# Altium PCB final_sensor_pcb_v3.PcbDoc (part 2 of 3)
Units mm, origin at the board's own origin, x right, y up, seen from the top; angles counter-clockwise.
Board outline 108.2 x 22.22 mm, 2 copper layers (Top Layer, Bottom Layer); 92 components, 55 nets, 247 pads, 83 vias.
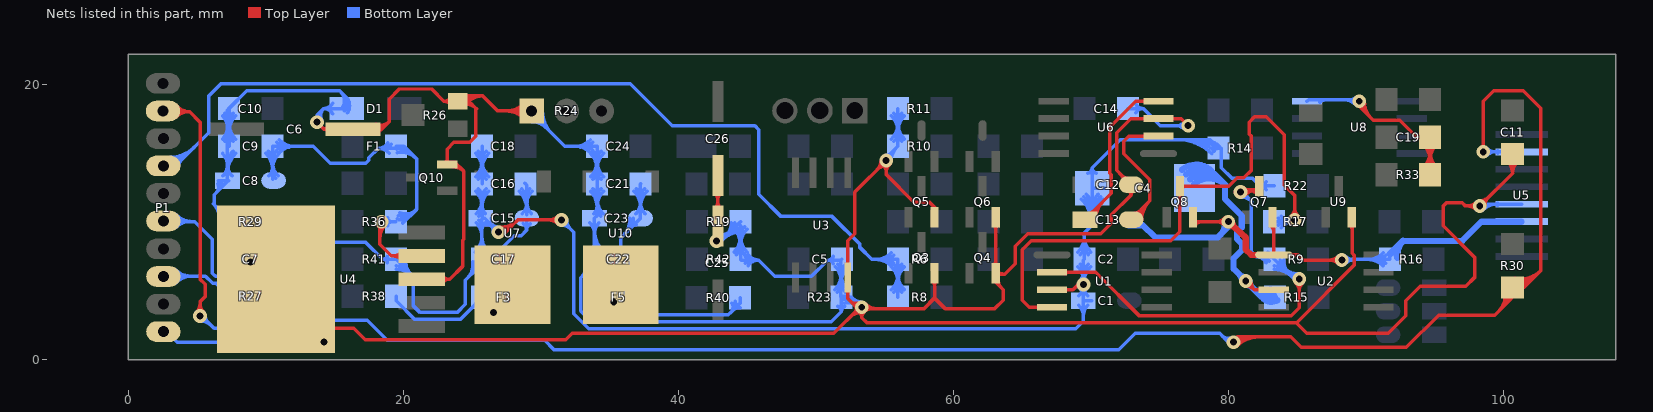
[diagram p2: the nets of this part, all layers, seen from the top]

## Via types
v1: diameter 1, hole 0.5, Top Layer to Bottom Layer, 83 vias

## Nets (pads, with @x,y where several pads share a name; then routed paths per layer and width w, separated by ;. In a path a pad name is that pad's centre, name@x,y a point inside that pad or via, vN(x,y) a via of type N, cw(c..) or ccw(c..) an arc to the next point about the centre after c; other vN are vias at no path point) (continued)
GNDA: C5.1 C6.2 C7.1 C8.2 C9.1 C10.1 C11.1 C12.1 C14.1 C21.1 C22.1 C23.2 C24.1 C25.2 C26.2 D1.1 P1.1 Q3.2 Q4.2 Q5.2 Q6.2 Q10.2 R10.2 R11.2 R19.1 R23.2 R24.1 R26.3 R29.1 R42.1 U3.4 U4.3 U5.4 U6.3 U9.2 | length 505.7
  Top Layer w0.254: U4.3@13.687,1.841 cw(c14.76,0.768) U4.3@14.76,2.286 ; v1(13.716,17.272) 14.224,16.764 ; C6.2@14.5,16.595 ccw(c14.224,16.455) 14.224,16.764 ; C6.2@14.5,16.933 cw(c14.224,17.073) 14.224,16.764 ; U4.3@14.859,2.286 16.383,2.286 17.232,1.437 31.809,1.437 32.277,1.905 51.308,1.905 53.086,3.683 v1@53.34,3.683 ; C6.2@14.859,16.764 14.224,16.764 ; C6.2@16.332,16.764 18.415,16.764 ; C6.2@17.782,16.639 ccw(c18.002,17.186) 18.42,16.769 ; C6.2@17.877,16.874 ccw(c18.159,17.573) 18.691,17.04 ; C6.2@17.972,17.11 ccw(c18.315,17.96) 18.963,17.312 ; C6.2@18.171,16.608 cw(c18.415,16.495) 18.415,16.764 ; C6.2@18.171,16.92 ccw(c18.415,17.033) 18.415,16.764 ; U4.3@21.336,5.842 23.368,5.842 ; U4.3@22.814,5.594 cw(c23.368,5.101) 23.368,5.842 ; U4.3@22.814,6.09 ccw(c23.368,6.583) 23.368,5.842 ; Q10.2@23.057,14.311 ccw(c22.761,14.607) 23.179,14.607 ccw(c23.597,14.607) Q10.2@23.301,14.311 ; Q10.2@23.114,14.351 Q10.2@23.179,14.351 ; Q10.2@23.179,14.189 Q10.2@23.179,14.351 ; R26.3@23.457,18.519 ccw(c22.943,18.18) 22.943,18.796 ; R26.3@23.472,19.062 cw(c22.943,19.455) 22.943,18.796 ; Q10.2@23.629,14.016 cw(c23.629,12.918) 24.406,13.694 ; Q10.2@23.629,14.27 cw(c23.629,13.785) 23.972,14.128 ; R26.3@23.979,19.06 cw(c24.167,18.336) 24.696,18.865 ; R26.3@24.024,18.801 cw(c24.771,18.246) 24.771,19.177 ; R26.3@24.028,18.805 cw(c24.392,18.427) 24.763,18.798 ; R26.3@24.043,18.814 cw(c24.297,17.838) 25.01,18.551 ; R26.3@24.107,18.568 cw(c24.427,17.34) 25.324,18.237 ; R26.3@24.204,18.622 cw(c24.571,18.24) 24.946,18.615 ; R26.3@24.228,18.649 cw(c25.276,17.872) 25.276,19.177 ; R26.3@24.257,19.177 25.781,19.177 ; R26.3@24.38,18.439 cw(c24.751,18.053) 25.129,18.432 ; R26.3@24.432,18.498 cw(c25.781,17.497) 25.781,19.177 ; R26.3@24.482,18.978 ccw(c24.765,19.108) 24.765,18.796 ; R26.3@24.493,18.61 cw(c24.765,18.505) 24.765,18.796 ; R24.1@28.79,17.538 ccw(c27.471,16.219) 27.471,18.085 ccw(c27.471,19.951) R24.1@28.79,18.632 ; R24.1@28.97,17.718 ccw(c28.084,16.832) 28.084,18.085 ccw(c28.084,19.338) R24.1@28.97,18.452 ; R24.1@29.337,18.085 26.873,18.085 25.781,19.177 ; C25.2@42.68,11.021 ccw(c42.208,11.493) 42.875,11.493 ; C26.2@42.682,12.093 cw(c42.216,11.627) 42.875,11.627 cw(c43.534,11.627) C26.2@43.068,12.093 ; C25.2@42.875,9.957 C26.2@42.875,13.386 ; 42.875,11.481 ccw(c43.526,11.481) C25.2@43.066,11.021 ; U3.4@52.237,5.032 cw(c52.027,4.822) 52.324,4.822 cw(c52.621,4.822) U3.4@52.411,5.032 ; U3.4@52.237,6.906 ccw(c52.027,7.116) 52.324,7.116 ccw(c52.621,7.116) U3.4@52.411,6.906 ; 52.486,3.083 cw(c53.34,2.23) v1@53.34,3.437 ; 52.515,4.254 ccw(c52.922,4.662) v1@53.176,4.145 ; 52.766,4.003 ccw(c53.087,4.325) v1@53.288,3.917 ; 52.793,3.39 ccw(c52.373,3.81) v1@52.967,3.81 ; 52.92,3.517 cw(c53.34,3.097) v1@53.34,3.691 ; v1@53.023,3.746 52.324,4.445 U3.4@52.324,5.969 52.324,8.636 52.832,9.144 52.832,12.192 v1(55.118,14.478) 55.118,13.462 57.1,11.48 57.197,11.48 57.247,11.43 58.293,11.43 58.639,11.084 Q5.2@58.639,10.349 ; v1@53.111,3.515 cw(c52.748,3.048) 53.34,3.048 ; v1@53.424,3.894 ccw(c53.934,4.404) 53.934,3.683 ccw(c53.934,3.216) v1@53.604,3.546 ; v1@53.569,3.515 ccw(c53.932,3.048) 53.34,3.048 ; v1@53.604,4.074 ccw(c54.547,5.017) 54.547,3.683 ; v1@54.745,14.478 cw(c53.845,14.478) 54.481,13.841 cw(c55.118,13.205) v1@55.118,14.105 ; v1@54.854,14.214 cw(c54.218,13.578) 55.118,13.578 cw(c56.018,13.578) v1@55.382,14.214 ; Q3.2@58.517,5.713 cw(c58.221,5.417) 58.639,5.417 cw(c59.057,5.417) Q3.2@58.761,5.713 ; 58.578,11.145 cw(c58.237,10.803) Q5.2@58.72,10.798 ; Q3.2@58.639,6.285 58.639,4.48 ; Q4.2@62.962,6.857 ccw(c62.666,7.153) 63.084,7.153 ccw(c63.502,7.153) Q4.2@63.206,6.857 ; Q6.2@62.962,9.777 cw(c62.666,9.481) 63.084,9.481 cw(c63.502,9.481) Q6.2@63.206,9.777 ; Q6.2@63.084,10.349 Q4.2@63.084,6.285 63.084,5.623 63.627,5.08 63.627,4.318 62.992,3.683 59.436,3.683 58.639,4.48 ; Q4.2@63.119,6.223 63.754,6.223 64.516,6.985 64.516,8.255 65.405,9.144 70.739,9.144 71.501,9.906 71.501,10.541 72.934,11.974 ; Q4.2@63.206,6.407 ccw(c63.651,6.852) 63.651,6.223 ; Q4.2@63.257,5.833 ccw(c64.158,5.823) 63.521,5.186 ; 72.122,13.538 cw(c71.405,12.821) C12.1@72.416,12.742 ; 72.339,13.321 ccw(c72.634,13.616) C12.1@72.634,13.198 ; C12.1@72.73,12.299 cw(c72.575,11.974) 72.934,11.974 ; C12.1@73.139,12.299 ccw(c73.294,11.974) 72.934,11.974 ; U6.3@73.993,17.439 ccw(c73.783,17.229) 73.783,17.526 ccw(c73.783,17.823) U6.3@73.993,17.613 ; U6.3@75.867,17.439 cw(c76.077,17.229) 76.077,17.526 cw(c76.077,17.823) U6.3@75.867,17.613 ; v1(77.089,17.018) 76.581,17.526 U6.3@74.93,17.526 72.898,17.526 71.882,16.51 71.882,13.778 C12.1@72.934,12.725 72.934,11.974 ; 85.026,2.73 89.154,6.858 89.154,7.596 89.027,7.723 89.027,10.314 U9.2@88.992,10.349 ; U9.2@88.87,9.777 cw(c88.49,9.397) 89.027,9.397 ; 89.027,9.566 cw(c89.325,9.566) U9.2@89.114,9.777 ; v1@98.034,10.912 ccw(c97.398,10.276) 97.398,11.176 ccw(c97.398,12.076) v1@98.034,11.44 ; v1@98.298,11.549 ccw(c98.298,12.449) 98.935,11.813 ccw(c99.571,11.176) v1@98.671,11.176 ; C11.1@100.262,14.451 cw(c99.545,13.564) 100.686,13.564 ; C11.1@100.422,14.648 cw(c99.975,14.096) 100.686,14.096 cw(c101.396,14.096) C11.1@100.949,14.648 ; C11.1@100.494,14.329 cw(c100.417,14.072) 100.686,14.072 ; C11.1@100.877,14.329 ccw(c100.954,14.072) 100.686,14.072 ; C11.1@101.109,14.451 ccw(c101.827,13.564) 100.686,13.564 ; 18.415,16.764 18.963,17.312 18.963,18.948 19.7,19.685 22.054,19.685 22.943,18.796 ; 22.943,18.796 24.765,18.796 ; Q10.2@23.179,14.351 23.179,15.302 23.676,15.799 24.816,15.799 25.273,16.256 25.273,18.288 24.765,18.796 ; Q10.2@23.179,14.351 23.749,14.351 24.384,13.716 24.384,8.745 24.301,8.662 24.301,6.775 23.368,5.842 ; 53.34,3.048 v1@53.34,3.683 ; 53.34,3.048 53.721,2.667 84.963,2.667 85.725,1.905 91.63,1.905 92.917,3.192 92.917,4.271 93.98,5.334 97.282,5.334 97.917,5.969 97.917,7.449 95.631,9.735 95.631,11.176 95.877,11.422 97.012,11.422 97.258,11.176 v1(98.298,11.176) 100.686,13.564 ; v1@53.34,3.683 57.842,3.683 58.639,4.48 ; 100.686,13.564 C11.1@100.686,14.974 100.686,14.072
  Bottom Layer w0.254: P1.1@2.794,2.032 3.556,1.27 v1(14.224,1.27) ; 6.18,11.323 cw(c5.051,10.195) R29.1@6.645,10.116 ; 6.344,11.159 ccw(c7.317,12.133) R29.1@7.317,10.756 ; 6.407,12.178 ccw(c6.044,12.541) C8.2@6.491,12.794 ; C8.2@6.549,13.026 C8.2@7.203,13.026 ; 6.585,10.918 cw(c5.823,10.157) R29.1@6.899,10.104 ; 6.644,12.415 ccw(c6.346,12.712) C8.2@6.712,12.919 ; R29.1@6.777,10.726 ccw(c7.317,11.266) R29.1@7.317,10.502 ; C7.1@6.814,7.816 ccw(c5.598,9.031) 7.317,9.031 ; R29.1@6.842,9.507 cw(c5.693,8.358) 7.317,8.358 cw(c8.942,8.358) R29.1@7.793,9.507 ; C9.1@6.842,14.994 cw(c5.968,14.12) 7.203,14.12 ; C8.2@6.869,13.361 ccw(c6.061,14.168) 7.203,14.168 ccw(c8.345,14.168) C8.2@7.538,13.361 ; C7.1@6.994,7.636 ccw(c6.212,8.418) 7.317,8.418 ; R29.1@7.021,9.687 cw(c6.306,8.972) 7.317,8.972 cw(c8.329,8.972) R29.1@7.614,9.687 ; C9.1@7.021,15.866 ccw(c6.306,16.581) 7.317,16.581 ccw(c8.329,16.581) 7.614,15.866 cw(c8.605,16.857) 7.203,16.857 ; C10.1@7.021,17.916 cw(c6.306,17.201) 7.317,17.201 cw(c8.329,17.201) 7.614,17.916 ccw(c8.605,16.925) 7.203,16.925 ; R29.1@7.136,10.033 R29.1@7.317,10.033 ; C8.2@7.183,12.954 6.231,12.002 6.231,11.272 7.317,10.186 R29.1@7.317,10.033 ; C8.2@7.203,13.569 cw(c9.218,13.569) C9.1@7.793,14.994 ; 7.203,14.182 cw(c8.605,14.182) C9.1@7.614,15.173 ; C9.1@7.203,16.312 cw(c9.218,16.312) 7.793,17.737 ccw(c8.942,16.588) 7.317,16.588 ccw(c5.693,16.588) 6.842,17.737 cw(c5.968,16.864) 7.203,16.864 ; 7.203,16.919 cw(c5.968,16.919) 6.842,16.045 ccw(c5.693,17.194) 7.317,17.194 ccw(c8.942,17.194) 7.793,16.045 cw(c9.218,17.47) C10.1@7.203,17.47 ; C7.1@7.302,7.278 C7.1@7.29,7.29 7.468,7.112 v1(8.89,7.112) cw(c8.89,8.438) C7.1@7.829,7.643 ; C8.2@7.311,13.026 C8.2@7.203,13.026 ; C7.1@7.317,7.438 R29.1@7.317,10.033 ; 7.317,8.285 ccw(c8.235,8.285) C7.1@7.586,7.636 ; 7.317,8.898 ccw(c8.848,8.898) C7.1@7.766,7.816 ; C9.1@7.317,15.519 C10.1@7.317,18.263 ; C7.1@7.625,7.491 ccw(c8.382,8.058) 8.382,7.112 ; C7.1@7.766,6.764 cw(c8.606,5.924) v1@8.606,7.112 ; v1@8.626,6.848 ccw(c7.99,6.212) 7.99,7.112 ccw(c7.99,8.012) v1@8.626,7.376 ; v1(13.716,17.272) 13.716,17.78 14.199,18.263 ; v1@13.824,17.323 cw(c14.37,17.58) 13.943,18.007 ; v1@13.96,1.006 ccw(c13.324,0.37) 13.324,1.27 ccw(c13.324,2.17) v1@13.96,1.534 ; v1@14.053,17.431 cw(c14.718,17.744) 14.199,18.263 ; D1.1@14.855,17.891 ccw(c14.199,17.498) 14.199,18.263 ; D1.1@14.855,18.634 cw(c14.199,19.028) 14.199,18.263 ; 15.405,19.52 cw(c14.705,18.82) D1.1@15.507,18.24 ; 15.616,19.309 cw(c14.95,18.643) D1.1@15.712,18.091 ; D1.1@15.826,19.099 cw(c15.194,18.466) D1.1@15.918,17.942 ; D1.1@15.875,18.263 14.199,18.263 ; D1.1@15.875,18.415 15.875,19.05 15.367,19.558 8.613,19.558 C10.1@7.317,18.263 ; R24.1@29.337,17.312 cw(c29.337,15.876) 30.353,16.891 ; R24.1@29.337,17.566 cw(c29.337,16.743) R24.1@29.919,17.325 ; R24.1@29.337,18.034 29.337,17.907 31.725,15.519 C24.1@34.087,15.519 ; R24.1@29.602,18.085 ccw(c30.672,18.085) R24.1@29.915,17.329 ; R24.1@29.856,18.085 ccw(c31.539,18.085) 30.349,16.895 ; R24.1@30.11,18.085 ccw(c32.406,18.085) 30.782,16.462 ; 32.944,5.995 ccw(c31.805,7.134) C22.1@33.415,7.209 ; 33.113,6.164 cw(c34.087,5.19) C22.1@34.087,6.567 ; 33.351,6.401 ccw(c32.582,7.17) C22.1@33.668,7.22 ; C22.1@33.547,6.597 cw(c34.087,6.057) C22.1@34.087,6.821 ; C23.2@33.56,9.949 cw(c32.753,9.141) 33.895,9.141 cw(c35.037,9.141) C23.2@34.229,9.949 ; C22.1@33.611,7.816 ccw(c32.926,8.501) 33.895,8.501 ; C21.1@33.611,12.25 cw(c32.462,11.102) 34.087,11.102 cw(c35.712,11.102) C21.1@34.563,12.25 ; C21.1@33.611,13.302 ccw(c32.462,14.451) 34.087,14.451 ccw(c35.712,14.451) C21.1@34.563,13.302 ; C24.1@33.611,14.994 cw(c32.462,13.845) 34.087,13.845 cw(c35.712,13.845) C24.1@34.563,14.994 ; C24.1@33.611,15.044 ccw(c32.462,13.895) 32.462,15.519 ccw(c32.462,17.144) C24.1@33.611,15.995 ; C21.1@33.791,12.43 cw(c33.075,11.715) 34.087,11.715 cw(c35.098,11.715) C21.1@34.383,12.43 ; C21.1@33.791,13.123 ccw(c33.075,13.838) 34.087,13.838 ccw(c35.098,13.838) C21.1@34.383,13.123 ; C24.1@33.791,15.173 cw(c33.075,14.458) 34.087,14.458 cw(c35.098,14.458) C24.1@34.383,15.173 ; C24.1@33.791,15.223 ccw(c33.075,14.508) 33.075,15.519 ccw(c33.075,16.531) C24.1@33.791,15.816 ; C22.1@33.808,7.112 C22.1@34.036,7.112 ; C23.2@33.86,10.617 ccw(c33.313,11.165) 34.087,11.165 ; 33.895,8.202 ccw(c34.949,8.202) C22.1@34.203,7.457 ; 33.895,8.815 ccw(c35.562,8.815) C22.1@34.383,7.636 ; 33.895,9.429 ccw(c36.176,9.429) C22.1@34.563,7.816 ; C22.1@34.062,7.112 32.893,5.943 32.893,3.826 32.906,3.813 32.906,3.539 33.702,2.743 51.13,2.743 51.855,3.468 ; C22.1@34.087,7.29 33.895,7.482 C23.2@33.895,10.283 34.087,10.475 C21.1@34.087,12.776 C24.1@34.087,15.519 ; 34.087,11.072 ccw(c34.984,11.072) C23.2@34.349,10.438 ; 34.087,11.685 ccw(c35.597,11.685) C23.2@34.529,10.617 ; C24.1@34.099,15.531 C24.1@34.087,15.519 ; v1(42.775,8.636) 43.145,8.636 R19.1@44.526,10.017 ; v1@42.775,8.755 ccw(c42.775,9.936) 43.61,9.101 ; v1@42.775,9.009 ccw(c42.775,10.803) R19.1@44.044,9.535 ; 43.292,8.782 cw(c44.526,7.548) R19.1@44.526,9.294 ; 43.413,8.903 ccw(c42.349,9.967) R19.1@43.853,9.967 ; 43.726,9.216 cw(c44.526,8.415) R19.1@44.526,9.548 ; R19.1@43.846,9.337 ccw(c43.216,9.967) R19.1@44.107,9.967 ; R42.1@44.05,7.816 ccw(c42.901,8.965) 44.526,8.965 ccw(c46.151,8.965) R42.1@45.002,7.816 ; R19.1@44.05,9.491 cw(c42.901,8.342) 44.526,8.342 cw(c46.151,8.342) R19.1@45.002,9.491 ; R42.1@44.23,7.636 ccw(c43.515,8.351) 44.526,8.351 ccw(c45.538,8.351) R42.1@44.822,7.636 ; R19.1@44.23,9.67 cw(c43.515,8.955) 44.526,8.955 cw(c45.538,8.955) R19.1@44.822,9.67 ; R19.1@44.526,9.728 R42.1@44.526,7.29 44.577,7.239 45.847,7.239 ; R42.1@44.865,6.993 cw(c45.348,6.642) 45.348,7.239 ; R42.1@44.865,7.486 ccw(c45.349,7.836) 45.349,7.239 ; R42.1@45.07,6.844 cw(c45.847,6.278) 45.847,7.239 ; R42.1@45.071,7.635 ccw(c45.847,8.197) 45.847,7.239 ; C5.1@51.274,7.507 cw(c50.867,7.682) 50.867,7.239 ; C5.1@51.275,6.972 ccw(c50.867,6.794) 50.867,7.239 ; R23.2@51.379,5.072 ccw(c50.324,6.128) 51.816,6.128 ; C5.1@51.416,6.764 cw(c50.451,5.799) 51.816,5.799 ; R23.2@51.559,4.893 ccw(c50.937,5.515) 51.816,5.515 ; R23.2@51.585,3.88 cw(c51.405,3.468) 51.855,3.468 ; C5.1@51.596,6.944 cw(c51.065,6.412) 51.816,6.412 ; 51.816,5.431 cw(c53.701,5.431) C5.1@52.368,6.764 ; 51.816,5.702 ccw(c52.96,5.702) R23.2@52.151,4.893 ; 51.816,6.044 cw(c53.088,6.044) C5.1@52.188,6.944 ; 51.816,6.315 ccw(c53.573,6.315) R23.2@52.331,5.072 ; R23.2@51.83,4.582 cw(c52.109,3.61) 52.825,4.325 ; C5.1@51.855,7.252 C5.1@51.892,7.29 ; R23.2@51.9,4.338 cw(c52.245,3.136) v1@53.13,4.02 ; R23.2@51.943,4.572 51.816,4.699 51.816,7.239 50.867,7.239 ; R23.2@51.97,4.094 cw(c52.381,2.662) v1@53.434,3.716 ; R23.2@52.124,3.88 ccw(c52.305,3.468) 51.855,3.468 ; v1@52.967,3.81 ccw(c52.067,3.81) 52.703,4.447 ccw(c53.34,5.083) v1@53.34,4.183 ; v1(53.34,3.81) 52.603,4.547 R23.2@51.855,4.547 51.855,3.468 ; v1(55.118,14.478) 55.118,14.669 R10.2@55.968,15.519 R11.2@55.968,18.263 ; v1@55.118,14.851 ccw(c55.118,15.29) R10.2@55.428,14.98 ; v1@55.237,14.478 cw(c55.986,14.478) R10.2@55.456,15.008 ; v1@55.491,14.478 cw(c56.853,14.478) R10.2@55.89,15.441 ; R10.2@55.492,16.045 ccw(c54.343,17.194) 55.968,17.194 ccw(c57.593,17.194) R10.2@56.444,16.045 ; R11.2@55.492,17.737 cw(c54.343,16.588) 55.968,16.588 cw(c57.593,16.588) R11.2@56.444,17.737 ; R10.2@55.672,15.866 ccw(c54.957,16.581) 55.968,16.581 ccw(c56.98,16.581) R10.2@56.264,15.866 ; R11.2@55.672,17.916 cw(c54.957,17.201) 55.968,17.201 cw(c56.98,17.201) R11.2@56.264,17.916 ; C14.1@72.695,18.263 73.812,18.263 ; C14.1@73.29,17.948 cw(c73.812,17.671) 73.812,18.263 ; C14.1@73.29,18.577 ccw(c73.812,18.854) 73.812,18.263 ; v1@76.825,16.754 ccw(c76.189,16.118) 76.189,17.018 ccw(c76.189,17.918) v1@76.825,17.282 ; v1(77.089,17.018) 75.057,17.018 73.812,18.263 ; v1@98.298,11.303 U5.4@101.346,11.303 ; v1@98.382,11.092 cw(c98.892,10.582) 98.892,11.303 cw(c98.892,11.77) v1@98.562,11.44 ; v1@98.562,10.912 cw(c99.505,9.969) U5.4@99.505,11.303 ; U5.4@99.604,11.216 ccw(c99.394,11.006) 99.394,11.303 ccw(c99.394,11.6) U5.4@99.604,11.39 ; C8.2@7.203,13.026 7.203,18.148 C10.1@7.317,18.263 ; 45.847,7.239 47.027,6.059 49.687,6.059 50.867,7.239
GNDD: C1.2 C2.2 C4.2 C15.2 C16.1 C17.1 C18.1 P1.5 Q7.2 Q8.2 R14.1 R16.2 R22.1 R41.1 U1.3 U2.1 U5.3 | length 259.9
  Top Layer w0.254: v1@26.915,9.136 ccw(c26.967,9.928) 27.528,9.367 ; v1(26.924,9.271) 27.432,9.271 28.321,10.16 ; v1@26.932,9.39 ccw(c27.016,10.672) 27.924,9.763 ; v1@26.948,9.643 ccw(c27.064,11.417) 28.321,10.16 ; v1@31.232,9.896 ccw(c30.596,9.26) 30.596,10.16 ccw(c30.596,11.06) v1@31.232,10.424 ; v1(31.496,10.16) 28.321,10.16 ; U1.3@67.183,5.08 68.707,5.08 69.215,5.588 v1@69.469,5.588 ; U1.3@68.12,4.993 cw(c68.33,4.783) 68.33,5.08 cw(c68.33,5.377) U1.3@68.12,5.167 ; 68.818,5.191 cw(c69.257,4.751) v1@69.435,5.347 ; Q8.2@77.557,9.777 cw(c78.176,9.158) 78.176,10.033 ; Q8.2@77.624,10.033 v1(80.01,10.033) ; v1@79.746,9.769 ccw(c79.11,9.133) 79.11,10.033 ccw(c79.11,10.933) v1@79.746,10.297 ; Q7.2@83.091,9.777 cw(c82.558,9.244) 83.312,9.244 ; Q7.2@83.213,10.349 83.312,10.25 U2.1@83.312,7.62 85.09,7.62 85.471,7.239 v1(88.265,7.239) ; U2.1@83.225,7.707 ccw(c83.015,7.917) 83.312,7.917 ccw(c83.609,7.917) U2.1@83.399,7.707 ; U2.1@84.499,7.533 cw(c84.709,7.323) 84.709,7.62 cw(c84.709,7.917) U2.1@84.499,7.707 ; v1@88.001,6.975 ccw(c87.365,6.339) 87.365,7.239 ccw(c87.365,8.139) v1@88.001,7.503
  Top Layer w0.45: v1(80.01,10.033) 81.28,8.89 81.28,8.001 81.661,7.62 U2.1@83.312,7.62 ; v1@80.024,9.758 cw(c80.059,9.095) 80.503,9.589 cw(c80.948,10.082) v1@80.285,10.047
  Bottom Layer w0.254: P1.5@2.794,10.033 4.826,10.033 6.109,8.75 6.109,6.282 6.332,6.059 8.165,6.059 8.89,5.334 8.89,3.81 9.398,3.302 11.557,3.302 12.827,4.572 12.827,8.001 13.347,8.521 17.265,8.521 18.496,7.29 R41.1@19.47,7.29 20.701,6.059 20.701,3.937 21.209,3.429 23.92,3.429 24.511,4.02 24.511,5.765 25.4,6.654 C17.1@25.4,7.366 ; P1.5@3.301,9.823 cw(c3.808,9.316) 3.808,10.033 ; P1.5@3.301,10.345 ccw(c4.053,11.097) 4.053,10.033 ; P1.5@3.481,9.643 cw(c4.421,8.702) 4.421,10.033 ; P1.5@3.481,10.524 ccw(c4.667,11.71) 4.667,10.033 ; R41.1@18.84,7.052 ccw(c18.496,6.921) 18.496,7.29 ccw(c18.496,7.658) R41.1@18.84,7.528 ; R41.1@19.47,6.567 cw(c19.47,4.821) 20.704,6.056 ; R41.1@19.47,6.821 cw(c19.47,5.689) 20.27,6.489 ; R41.1@19.889,7.24 ccw(c20.78,7.24) R41.1@20.15,6.61 ; R41.1@20.143,7.24 ccw(c21.647,7.24) 20.583,6.176 ; 24.652,5.906 ccw(c23.663,6.894) C17.1@25.041,7.127 ; 24.999,6.253 ccw(c24.258,6.995) C17.1@25.292,7.17 ; 25.036,6.29 cw(c25.705,5.621) C17.1@25.705,6.567 ; C17.1@25.229,7.816 ccw(c24.08,8.965) 25.705,8.965 ccw(c27.33,8.965) C17.1@26.181,7.816 ; C16.1@25.256,12.25 cw(c24.107,11.102) 25.732,11.102 cw(c27.357,11.102) C16.1@26.208,12.25 ; C16.1@25.256,13.302 ccw(c24.107,14.451) 25.732,14.451 ccw(c27.357,14.451) C16.1@26.208,13.302 ; C18.1@25.256,14.994 cw(c24.107,13.845) 25.732,13.845 cw(c27.357,13.845) C18.1@26.208,14.994 ; C15.2@25.294,9.949 cw(c24.303,8.957) 25.705,8.957 ; C15.2@25.294,10.617 ccw(c24.237,11.674) 25.732,11.674 ; C17.1@25.409,7.636 ccw(c24.693,8.351) 25.705,8.351 ccw(c26.716,8.351) C17.1@26.001,7.636 ; C16.1@25.436,12.43 cw(c24.72,11.715) 25.732,11.715 cw(c26.743,11.715) C16.1@26.028,12.43 ; C16.1@25.436,13.123 ccw(c24.72,13.838) 25.732,13.838 ccw(c26.743,13.838) C16.1@26.028,13.123 ; C18.1@25.436,15.173 cw(c24.72,14.458) 25.732,14.458 cw(c26.743,14.458) C18.1@26.028,15.173 ; C15.2@25.474,10.128 cw(c24.916,9.57) 25.705,9.57 ; C15.2@25.474,10.438 ccw(c24.851,11.061) 25.732,11.061 ; 25.705,9.325 cw(c26.586,9.325) C15.2@25.963,9.949 ; C15.2@25.705,10.207 C17.1@25.705,7.29 25.73,7.29 C17.1@25.781,7.239 ; C15.2@25.732,10.234 C16.1@25.732,12.192 ; 25.732,11.176 ccw(c26.521,11.176) C15.2@25.963,10.617 ; C16.1@25.732,12.776 C18.1@25.732,15.519 ; C15.2@25.781,10.287 25.908,10.287 v1(26.924,9.271) ; C15.2@25.929,9.81 cw(c25.929,8.708) v1@26.708,9.487 ; C15.2@26.402,10.283 ccw(c27.584,10.283) v1@26.748,9.447 ; v1@26.551,9.271 ccw(c25.651,9.271) 26.287,9.908 ccw(c26.924,10.544) v1@26.924,9.644 ; v1@31.496,9.787 cw(c31.496,8.887) 32.133,9.523 cw(c32.769,10.16) v1@31.869,10.16 ; v1(31.496,10.16) 32.385,9.271 32.385,3.615 32.398,3.603 32.398,3.328 33.491,2.235 68.91,2.235 69.469,2.794 C1.2@69.469,4.191 ; C2.2@69.056,6.764 cw(c68.09,5.798) v1@69.456,5.798 ; C2.2@69.056,7.816 ccw(c67.907,8.965) 69.532,8.965 ccw(c71.157,8.965) C2.2@70.008,7.816 ; C1.2@69.122,3.962 cw(c68.283,3.124) 69.469,3.124 ; C1.2@69.122,4.631 ccw(c68.314,5.439) 69.456,5.439 ccw(c70.598,5.439) C1.2@69.791,4.631 ; v1@69.205,5.197 cw(c68.599,4.591) C1.2@69.456,4.591 ; v1@69.205,5.725 ccw(c68.599,6.331) 69.456,6.331 ; C2.2@69.236,6.943 cw(c68.703,6.411) 69.456,6.411 ; C2.2@69.236,7.636 ccw(c68.52,8.351) 69.532,8.351 ccw(c70.543,8.351) C2.2@69.828,7.636 ; C4.2@69.314,11.673 cw(c67.438,9.779) 70.104,9.779 ; C1.2@69.456,4.53 cw(c70.4,4.53) v1@69.733,5.197 ; v1@69.456,5.432 cw(c71.339,5.432) C2.2@70.008,6.764 ; 69.456,6.046 cw(c70.726,6.046) C2.2@69.828,6.943 ; 69.456,6.392 ccw(c70.4,6.392) v1@69.733,5.725 ; 69.469,3.186 cw(c70.567,3.186) C1.2@69.791,3.962 ; C4.2@69.493,11.854 cw(c68.041,10.388) 70.104,10.388 cw(c72.167,10.388) C4.2@70.715,11.854 ; C4.2@69.671,12.034 cw(c68.644,10.997) 70.104,10.997 cw(c71.564,10.997) C4.2@70.537,12.034 ; C4.2@69.789,13.549 ccw(c69.666,13.97) 70.104,13.97 ; C1.2@70.083,4.297 C1.2@69.456,4.297 69.456,7.214 C2.2@69.532,7.29 69.532,9.207 70.104,9.779 ; C4.2@70.419,13.549 cw(c70.542,13.97) 70.104,13.97 ; C4.2@70.894,11.673 ccw(c72.77,9.779) 70.104,9.779 ; C4.2@71.222,12.471 C4.2@70.104,12.471 ; 76.321,16.002 cw(c76.321,12.466) R14.1@78.822,14.966 ; 76.935,16.002 cw(c76.935,13.08) R14.1@79.001,15.146 ; 77.548,16.002 cw(c77.548,13.693) R14.1@79.181,15.326 ; 78.161,16.002 cw(c78.161,14.306) R14.1@79.36,15.505 ; R22.1@82.752,12.364 ccw(c82.303,12.154) 82.303,12.649 ; R22.1@82.752,12.934 cw(c82.303,13.144) 82.303,12.649 ; R22.1@83.361,12.649 82.303,12.649 ; v1(88.265,7.239) 88.646,7.239 88.697,7.29 R16.2@91.757,7.29 R16.2@91.757,7.683 ; v1@88.529,6.975 cw(c89.288,6.216) 89.288,7.29 ; v1@88.529,7.503 ccw(c89.043,8.017) 89.043,7.29 ; R16.2@91.281,6.814 ccw(c90.132,5.665) 90.132,7.29 ccw(c90.132,8.914) R16.2@91.281,7.765 ; R16.2@91.461,6.993 ccw(c90.745,6.278) 90.745,7.29 ccw(c90.745,8.301) R16.2@91.461,7.586 ; 70.104,9.779 C4.2@70.104,12.471 ; C4.2@70.104,12.471 70.104,13.97 ; 70.104,13.97 72.136,16.002 78.688,16.002 R14.1@79.297,15.392 79.502,15.392 79.502,13.97 80.264,13.208 81.744,13.208 82.303,12.649
  Bottom Layer w0.45: 72.771,9.779 73.787,9.779 74.676,8.89 79.248,8.89 80.01,9.652 v1(80.01,10.033) ; 79.439,9.081 ccw(c78.686,9.833) v1@79.738,9.992 ; 92.71,8.636 97.028,8.636 98.425,10.033 U5.3@101.346,10.033
  Bottom Layer w0.5: R16.2@91.757,7.683 92.71,8.636 ccw(c93.73,7.616) R16.2@92.302,7.416
  other v1: 69.469,5.461
HMC_E\N\: P1.3 R27.2 | length 11.6
  Bottom Layer w0.254: P1.3@2.54,6.096 2.564,6.072 5.601,6.072 6.122,5.551 6.387,5.551 7.239,4.699 R27.2@7.239,4.572 ; P1.3@3.301,5.784 cw(c3.995,5.09) 3.995,6.072 ; P1.3@3.301,6.306 ccw(c3.867,6.872) 3.867,6.072 ; P1.3@3.302,6.045 P1.3@3.302,6.223 ; P1.3@3.481,5.605 cw(c4.608,4.477) 4.608,6.072 ; P1.3@3.481,6.486 ccw(c4.48,7.485) 4.48,6.072 ; R27.2@6.662,4.749 ccw(c5.761,4.888) 6.405,5.533 ccw(c7.002,6.13) R27.2@7.183,5.305 ; R27.2@6.734,5.204 ccw(c7.121,5.591) R27.2@7.238,5.057
IN_RESET: Q7.3 R9.1 U1.2 | length 48.2
  Top Layer w0.254: U1.2@67.183,6.35 70.37,6.35 73.545,3.175 82.05,3.175 82.054,3.179 84.586,3.179 85.166,3.759 v1(85.166,5.866) ; U1.2@68.12,6.263 cw(c68.33,6.053) 68.33,6.35 cw(c68.33,6.647) U1.2@68.12,6.437 ; v1@80.518,12.192 80.671,12.345 Q7.3@82.263,12.345 ; v1@80.983,12.108 cw(c81.556,11.535) 81.556,12.345 ; v1@81.163,11.928 cw(c82.169,10.922) Q7.3@82.169,12.345 ; v1@81.163,12.456 ccw(c81.43,12.723) 81.43,12.345 ; v1@81.373,12.345 cw(c81.373,11.258) Q7.3@82.141,12.027 ; Q7.3@81.986,12.345 cw(c81.986,11.871) Q7.3@82.321,12.206 ; v1@84.902,5.602 cw(c84.265,4.965) 85.166,4.965 cw(c86.066,4.965) v1@85.43,5.602
  Bottom Layer w0.254: v1@80.772,12.192 81.026,12.192 81.661,11.557 81.661,7.874 82.042,7.493 ; v1@80.909,11.819 cw(c80.938,10.707) 81.724,11.494 ; v1@81.272,12.192 ccw(c81.866,12.192) 81.446,11.772 ; 82.107,7.493 ccw(c82.107,8.594) R9.1@82.886,7.816 ; 82.448,7.493 cw(c82.448,6.896) R9.1@82.984,7.157 ; R9.1@82.756,7.046 ccw(c82.042,6.7) 82.042,7.493 ; R9.1@83.361,6.567 cw(c83.361,4.821) 84.596,6.055 ; R9.1@83.361,6.821 cw(c83.361,5.688) 84.162,6.489 ; R9.1@83.78,7.24 ccw(c84.671,7.24) R9.1@84.041,6.61 ; R9.1@83.88,6.772 ccw(c85.166,8.058) v1@85.166,6.239 ; R9.1@84.034,7.24 ccw(c85.538,7.24) 84.475,6.176 ; 84.313,6.338 ccw(c85.166,7.191) v1@85.166,5.985 ; v1(85.166,5.866) 85.015,5.715 84.936,5.715 R9.1@83.361,7.29 83.158,7.493 82.042,7.493
  other v1: 80.899,12.192
IN_SET: Q8.3 R17.1 U1.4 | length 50.2
  Top Layer w0.254: U1.4@66.246,3.723 ccw(c66.036,3.513) 66.036,3.81 ccw(c66.036,4.107) U1.4@66.246,3.897 ; U1.4@67.183,3.81 65.532,3.81 65.024,4.318 65.024,8.001 65.659,8.636 75.819,8.636 76.485,9.302 Q8.3@76.485,12.599 80.036,12.599 80.653,13.216 81.137,13.216 81.661,13.74 81.661,16.28 81.542,16.399 81.542,17.28 81.915,17.653 82.78,17.653 84.074,16.359 84.074,12.7 84.836,11.938 v1(84.836,10.16) ; Q8.3@76.363,12.027 cw(c76.067,11.731) 76.485,11.731 cw(c76.903,11.731) Q8.3@76.607,12.027 ; Q8.3@76.607,12.477 cw(c76.903,12.181) 76.903,12.599 cw(c76.903,13.017) Q8.3@76.607,12.721 ; v1@84.572,10.424 ccw(c83.936,11.06) 84.836,11.06 ccw(c85.736,11.06) v1@85.1,10.424
  Bottom Layer w0.254: R17.1@83.324,10.017 v1@84.693,10.017 ; R17.1@83.589,10.017 ccw(c83.589,11.407) v1@84.572,10.424 ; R17.1@83.656,9.761 cw(c84.176,9.36) 84.176,10.017 cw(c84.176,10.673) R17.1@83.656,10.272 ; R17.1@83.857,9.606 cw(c84.693,8.962) v1@84.693,10.017 ; R17.1@83.857,10.427 ccw(c84.693,11.071) v1@84.693,10.017 ; 84.202,10.017 ccw(c84.202,10.794) v1@84.752,10.244 ; 84.282,10.017 cw(c84.282,9.606) v1@84.572,9.896 ; v1(84.836,10.16) v1@84.693,10.017
MICRO_ADC: P1.9 R30.1 U5.7 | length 169.3
  Top Layer w0.254: P1.9@2.54,18.034 4.445,18.034 ; P1.9@3.276,17.824 cw(c3.783,17.317) 3.783,18.034 ; P1.9@3.299,18.32 ccw(c3.906,18.821) 3.906,18.034 ; P1.9@3.455,17.644 cw(c4.396,16.703) 4.396,18.034 ; P1.9@3.495,18.482 ccw(c4.445,19.266) 4.445,18.034 ; v1@4.943,3.439 ccw(c4.307,4.075) 5.207,4.075 ccw(c6.107,4.075) v1@5.471,3.439 ; v1(5.207,3.175) 5.207,4.215 5.58,4.588 5.58,5.469 5.207,5.842 5.207,17.272 4.445,18.034 ; v1@80.296,1.365 cw(c80.985,0.676) 80.985,1.651 ; v1@80.475,1.186 cw(c81.598,0.063) 81.598,1.651 ; v1@80.645,1.651 84.542,1.651 85.304,0.889 92.964,0.889 95.313,3.238 99.377,3.238 100.546,4.407 R30.1@100.546,5.118 ; v1@80.655,1.006 cw(c82.211,-0.55) 82.211,1.651 ; v1(98.552,15.113) 98.552,18.796 99.314,19.558 101.473,19.558 102.743,18.288 102.743,6.477 ; 99.758,3.619 ccw(c98.882,4.495) R30.1@100.018,4.99 ; 100.022,3.883 ccw(c99.25,4.655) R30.1@100.251,5.091 ; R30.1@100.127,4.699 R30.1@100.546,5.118 ; 100.286,4.147 ccw(c99.617,4.815) R30.1@100.484,5.192 ; R30.1@100.39,4.631 cw(c100.3,4.402) 100.546,4.402 cw(c100.734,4.402) R30.1@100.713,4.589 ; 100.55,4.411 ccw(c99.985,4.975) R30.1@100.717,5.293 ; R30.1@100.718,5.171 ccw(c100.946,6.276) 101.744,5.478 ; R30.1@100.769,5.419 ccw(c101.06,6.828) 102.077,5.811 ; R30.1@100.82,5.668 ccw(c101.174,7.38) 102.41,6.144 ; R30.1@100.872,5.917 ccw(c101.288,7.932) 102.743,6.477 ; R30.1@100.546,5.118 R30.1@100.686,5.258 101.524,5.258 102.743,6.477
  Bottom Layer w0.254: v1@5.185,3.324 6.223,2.286 11.978,2.286 12.55,2.858 17.378,2.858 18.84,1.397 30.27,1.397 30.955,0.711 72.042,0.711 73.235,1.905 79.375,1.905 80.01,1.27 v1(80.391,1.27) ; v1@5.207,2.802 cw(c5.207,1.595) 6.061,2.448 ; v1@5.207,3.056 cw(c5.207,2.462) 5.627,2.882 ; v1@5.58,3.175 ccw(c6.174,3.175) 5.754,2.755 ; 79.566,1.714 ccw(c79.973,2.122) v1@80.227,1.605 ; 79.817,1.463 ccw(c80.138,1.785) v1@80.339,1.377 ; v1(98.552,15.113) U5.7@101.346,15.113 ; v1@98.816,14.849 cw(c99.452,14.213) 99.452,15.113 cw(c99.452,16.013) v1@98.816,15.377 ; U5.7@99.604,15.026 ccw(c99.394,14.816) 99.394,15.113 ccw(c99.394,15.41) U5.7@99.604,15.2
N_CURRENT: P1.7 R6.2 R8.2 | length 84.7
  Bottom Layer w0.254: P1.7@3.04,14.212 ccw(c3.04,15.429) 3.9,14.568 ; P1.7@3.04,14.466 ccw(c3.04,16.296) 4.334,15.002 ; P1.7@3.04,14.72 ccw(c3.04,17.163) 4.768,15.436 ; P1.7@3.429,14.097 5.842,16.51 5.842,19.177 6.731,20.066 36.489,20.066 39.553,17.002 45.577,17.002 45.847,16.731 45.847,12.033 47.466,10.414 51.181,10.414 53.213,8.382 53.213,8.152 54.075,7.29 R6.2@55.968,7.29 R8.2@55.968,4.547 ; P1.7@3.663,14.097 cw(c4.228,14.097) 3.828,14.496 ; R8.2@55.492,5.072 ccw(c54.343,6.221) 55.968,6.221 ccw(c57.593,6.221) R8.2@56.444,5.072 ; R6.2@55.492,6.764 cw(c54.343,5.615) 55.968,5.615 cw(c57.593,5.615) R6.2@56.444,6.764 ; R6.2@55.492,6.814 ccw(c54.343,5.665) 54.343,7.29 ccw(c54.343,8.915) R6.2@55.492,7.766 ; R8.2@55.672,4.893 ccw(c54.956,5.608) 55.968,5.608 ccw(c56.98,5.608) R8.2@56.264,4.893 ; R6.2@55.672,6.944 cw(c54.957,6.228) 55.968,6.228 cw(c56.98,6.228) R6.2@56.264,6.944 ; R6.2@55.672,6.994 ccw(c54.957,6.278) 54.957,7.29 ccw(c54.957,8.301) R6.2@55.672,7.586
NetC4_1: C4.1 R15.2 U2.3 | length 33.2
  Top Layer w0.254: v1(81.28,5.715) 81.915,5.08 ; v1@81.281,5.342 cw(c81.283,4.448) 81.915,5.08 ; v1@81.653,5.714 ccw(c82.547,5.712) 81.915,5.08 ; U2.3@82.375,4.993 ccw(c82.165,4.783) 82.165,5.08 ccw(c82.165,5.377) U2.3@82.375,5.167 ; U2.3@83.312,5.08 81.915,5.08
  Bottom Layer w0.254: C4.1@78.823,13.506 C4.1@78.994,13.506
  Bottom Layer w0.45: C4.1@76.64,13.815 cw(c77.658,12.597) C4.1@78.78,13.719 ; C4.1@76.929,13.47 cw(c77.975,12.218) 79.128,13.371 ; C4.1@77.217,13.124 cw(c78.292,11.839) 79.476,13.023 ; C4.1@77.506,12.779 cw(c78.608,11.46) 79.824,12.675 ; C4.1@78.994,13.506 79.756,12.744 79.756,11.684 80.989,10.451 80.989,9.615 80.645,9.271 80.645,8.763 81.026,8.382 81.026,8.001 80.391,7.366 80.391,6.604 v1(81.28,5.715) 82.448,4.547 ; v1@81.005,5.715 ccw(c80.341,5.715) 80.811,6.184 ccw(c81.28,6.654) v1@81.28,5.99 ; v1@81.28,5.44 cw(c81.28,4.776) 81.749,5.246 cw(c82.219,5.715) v1@81.555,5.715 ; 81.781,5.214 ccw(c82.517,5.95) R15.2@83.086,5.078 ; 82.173,4.822 ccw(c82.827,5.476) R15.2@83.332,4.701 ; 82.565,4.43 ccw(c83.136,5.001) R15.2@83.578,4.324 ; R15.2@82.891,4.279 ccw(c82.448,4.046) 82.448,4.547 ; R15.2@82.891,4.814 cw(c82.448,5.047) 82.448,4.547 ; R15.2@83.4,4.547 82.448,4.547
NetC8_1: C8.1 C9.2 F1.1 R36.2 U4.4 | length 50.4
  Top Layer w0.254: v1@18.151,9.769 cw(c17.821,9.439) 18.288,9.439 cw(c19.009,9.439) v1@18.499,9.949 ; 18.288,8.826 cw(c19.622,8.826) v1@18.679,9.769 ; v1@18.288,9.906 18.288,8.382 19.128,7.542 U4.4@21.336,7.542 ; U4.4@19.872,7.278 ccw(c19.236,6.642) 19.236,7.542 ccw(c19.236,8.442) U4.4@19.872,7.806
  Bottom Layer w0.254: C9.2@10.004,14.994 cw(c8.856,13.845) 10.48,13.845 cw(c12.105,13.845) C9.2@10.956,14.994 ; C9.2@10.184,15.173 cw(c9.469,14.458) 10.48,14.458 cw(c11.492,14.458) C9.2@10.777,15.173 ; C8.1@10.222,13.361 ccw(c9.597,13.986) 10.48,13.986 ; C8.1@10.48,13.102 C9.2@10.48,15.519 13.437,15.519 14.668,14.288 17.265,14.288 17.488,14.512 17.488,14.67 18.185,15.367 ; 10.48,13.738 ccw(c11.267,13.738) C8.1@10.711,13.181 ; 10.48,14.351 ccw(c11.881,14.351) C8.1@10.89,13.361 ; C9.2@10.777,15.223 cw(c11.492,14.508) 11.492,15.519 cw(c11.492,16.531) C9.2@10.777,15.816 ; C9.2@10.956,15.044 cw(c12.105,13.895) 12.105,15.519 cw(c12.105,17.144) C9.2@10.956,15.995 ; 18.606,15.367 ccw(c18.606,15.924) F1.1@19.099,15.665 ; R36.2@18.679,9.769 cw(c19.315,9.133) 19.315,10.033 cw(c19.315,10.933) R36.2@18.679,10.297 ; R36.2@18.859,9.749 ccw(c18.415,9.543) v1(18.415,10.033) ; R36.2@18.859,10.317 cw(c18.415,10.523) v1(18.415,10.033) ; F1.1@18.874,15.783 cw(c18.185,16.146) 18.185,15.367 ; F1.1@18.97,15.018 ccw(c18.185,14.308) 18.185,15.367 ; R36.2@19.431,10.033 v1(18.415,10.033) ; F1.1@19.431,15.367 18.185,15.367 ; F1.1@19.47,15.519 20.041,15.519 20.955,14.605 20.955,10.922 ; F1.1@19.501,15.307 cw(c19.728,14.114) 20.587,14.973 ; R36.2@19.537,10.234 ccw(c19.864,10.968) 20.433,10.4 ; F1.1@19.548,15.058 cw(c19.837,13.545) 20.926,14.634 ; R36.2@19.64,10.466 ccw(c20.025,11.329) 20.694,10.661 ; R36.2@19.744,10.698 ccw(c20.186,11.691) 20.955,10.922 ; R36.2@19.939,9.906 20.955,10.922
NetC13_1: C13.1 U6.2 | length 13
  Top Layer w0.254: C13.1@72.934,10.185 74.295,11.546 74.295,13.081 72.39,14.986 72.39,15.875 72.771,16.256 U6.2@74.93,16.256 ; C13.1@73.234,10.658 ccw(c73.234,11.076) 73.53,10.781 ; C13.1@73.453,10.185 cw(c74.706,10.185) 73.82,11.071 ; C13.1@73.707,10.185 cw(c75.574,10.185) 74.254,11.505 ; U6.2@73.993,16.169 ccw(c73.783,15.959) 73.783,16.256 ccw(c73.783,16.553) U6.2@73.993,16.343
NetC13_2: C13.2 U6.4 | length 15.1
  Top Layer w0.254: C13.2@69.582,10.185 71.501,12.105 71.501,13.44 71.374,13.567 71.374,16.891 73.279,18.796 U6.4@74.93,18.796 ; C13.2@69.882,10.658 ccw(c69.882,11.076) C13.2@70.177,10.781 ; C13.2@70.101,10.185 cw(c71.354,10.185) 70.468,11.071 ; C13.2@70.355,10.185 cw(c72.221,10.185) 70.901,11.505 ; U6.4@73.993,18.709 ccw(c73.783,18.499) 73.783,18.796 ccw(c73.783,19.093) U6.4@73.993,18.883
NetC15_1: C15.1 C16.2 F3.1 R38.2 U7.2 | length 33
  Bottom Layer w0.254: R38.2@19.47,4.597 19.47,4.279 20.828,2.921 24.13,2.921 F3.1@25.654,4.445 ; F3.1@25.705,4.547 27.305,6.147 27.305,8.255 28.067,9.017 28.575,9.017 28.956,9.398 ; F3.1@25.705,5.016 ccw(c25.705,6.148) 26.505,5.347 ; F3.1@25.705,5.27 ccw(c25.705,7.015) 26.939,5.781 ; F3.1@25.724,3.824 cw(c25.751,2.867) 26.428,3.544 cw(c26.842,3.958) F3.1@26.313,4.209 ; F3.1@25.781,4.191 v1(26.543,3.429) ; F3.1@26.083,4.317 ccw(c26.496,4.122) F3.1@26.173,3.799 ; F3.1@26.124,4.597 cw(c27.015,4.597) F3.1@26.385,5.227 ; v1@26.17,3.429 ccw(c25.27,3.429) 25.906,4.066 ccw(c26.543,4.702) v1@26.543,3.802 ; F3.1@26.378,4.597 cw(c27.882,4.597) 26.818,5.66 ; C16.2@28.419,12.25 cw(c27.061,10.892) 28.981,10.892 ; C16.2@28.598,12.43 cw(c27.674,11.506) 28.981,11.506 ; C15.1@28.647,10.617 ccw(c27.839,11.425) 28.981,11.425 ccw(c30.123,11.425) C15.1@29.316,10.617 ; C15.1@28.701,9.902 cw(c28.33,9.398) 28.956,9.398 ; C16.2@28.844,12.827 C16.2@28.895,12.776 28.981,12.69 C15.1@28.981,10.541 ; C15.1@28.956,10.033 28.956,9.398 ; 28.981,11.311 cw(c30.31,11.311) C16.2@29.371,12.25 ; 28.981,11.924 cw(c29.697,11.924) C16.2@29.191,12.43 ; C15.1@29.227,9.879 ccw(c29.519,9.398) 28.956,9.398
NetC19_2: C19.2 R33.1 U8.8 | length 26.8
  Top Layer w0.254: v1(89.535,18.796) 89.535,18.434 90.558,17.411 92.474,17.411 93.705,16.18 ; v1@89.654,18.792 ccw(c90.714,18.755) 89.964,18.005 ; v1@89.908,18.783 ccw(c91.513,18.728) 90.377,17.592 ; C19.2@94.05,15.942 ccw(c93.705,15.811) 93.705,16.18 ; C19.2@94.05,16.418 cw(c93.705,16.548) 93.705,16.18 ; C19.2@94.203,15.654 cw(c93.054,14.505) 94.679,14.505 ; R33.1@94.215,13.963 ccw(c93.095,15.082) 94.679,15.082 ; C19.2@94.383,15.834 cw(c93.668,15.118) 94.679,15.118 ; R33.1@94.395,13.783 ccw(c93.709,14.469) 94.679,14.469 ; R33.1@94.679,13.449 C19.2@94.679,16.18 93.705,16.18 ; 94.679,14.505 cw(c96.304,14.505) C19.2@95.155,15.654 ; 94.679,14.527 ccw(c95.732,14.527) R33.1@94.987,13.783 ; 94.679,15.118 cw(c95.691,15.118) C19.2@94.975,15.834 ; 94.679,15.14 ccw(c96.345,15.14) R33.1@95.167,13.963
  Bottom Layer w0.254: U8.8@85.729,18.796 85.848,18.915 v1@89.416,18.915 ; U8.8@86.666,18.709 cw(c87.163,18.212) 87.163,18.915 ; 88.347,18.915 cw(c88.347,17.608) v1@89.271,18.532 ; 88.922,18.915 ccw(c88.922,19.409) v1@89.271,19.06 ; 88.96,18.915 cw(c88.96,18.221) v1@89.451,18.712
NetC21_2: C21.2 C23.1 F5.1 R40.2 U10.2 | length 46.3
  Top Layer w0: U10.2@35.941,4.191 U10.2@35.941,6.714
  Bottom Layer w0.254: F5.1@34.036,4.699 F5.1@34.239,4.699 ; F5.1@34.086,4.586 cw(c34.105,3.253) v1@35.047,4.196 ; F5.1@34.087,4.547 F5.1@34.138,4.597 ; F5.1@34.087,5.016 ccw(c34.087,6.148) 34.887,5.347 ; F5.1@34.087,5.27 ccw(c34.087,7.015) 35.321,5.781 ; F5.1@34.089,4.332 cw(c34.118,2.417) v1@35.472,3.771 ; F5.1@34.093,4.078 cw(c34.13,1.58) 35.897,3.346 ; F5.1@34.506,4.597 cw(c35.397,4.597) F5.1@34.767,5.227 ; F5.1@34.544,4.699 F5.1@34.239,4.699 ; F5.1@34.626,4.445 cw(c34.626,3.758) v1@35.206,4.127 ; F5.1@34.76,4.597 cw(c36.264,4.597) 35.2,5.66 ; v1@34.991,3.991 ccw(c34.163,3.463) 34.163,4.445 34.798,4.445 35.992,3.251 43.637,3.251 44.489,4.103 R40.2@44.489,4.496 ; v1@35.421,4.162 ccw(c35.896,4.04) 35.55,3.693 ; v1@35.667,4.099 ccw(c36.398,3.912) 35.865,3.378 ; 35.964,9 ccw(c34.731,10.233) C23.1@36.475,10.272 ; 36.384,9.42 ccw(c35.552,10.252) C23.1@36.728,10.278 ; 36.652,9.688 cw(c36.947,9.392) C23.1@36.947,9.81 ; C21.2@36.774,12.25 cw(c35.631,11.107) 37.247,11.107 ; C23.1@36.913,10.617 ccw(c36.106,11.425) 37.247,11.425 ccw(c38.389,11.425) C23.1@37.582,10.617 ; C21.2@36.954,12.43 cw(c36.244,11.72) 37.247,11.72 ; 37.247,11.096 cw(c38.88,11.096) C21.2@37.726,12.25 ; 37.247,11.709 cw(c38.267,11.709) C21.2@37.546,12.43 ; C21.2@37.25,12.776 37.247,12.774 C23.1@37.247,10.283 35.814,8.85 35.814,6.274 F5.1@34.239,4.699 ; 43.809,3.423 ccw(c43.401,3.831) R40.2@43.903,4.115 ; 43.926,3.54 cw(c44.489,2.976) R40.2@44.489,3.773 ; R40.2@44.045,3.659 ccw(c43.703,4.001) R40.2@44.124,4.24
  other v1: 35.306,4.191